# Altium PCB NEW_PCB_2020-12-06_19-04-42.pcbdoc
Units mm, origin at the board's own origin, x right, y up, seen from the top; angles counter-clockwise.
Board outline 47.45 x 32.73 mm, 2 copper layers (Top Layer, Bottom Layer); 1 components, 0 nets, 42 pads, 0 vias.
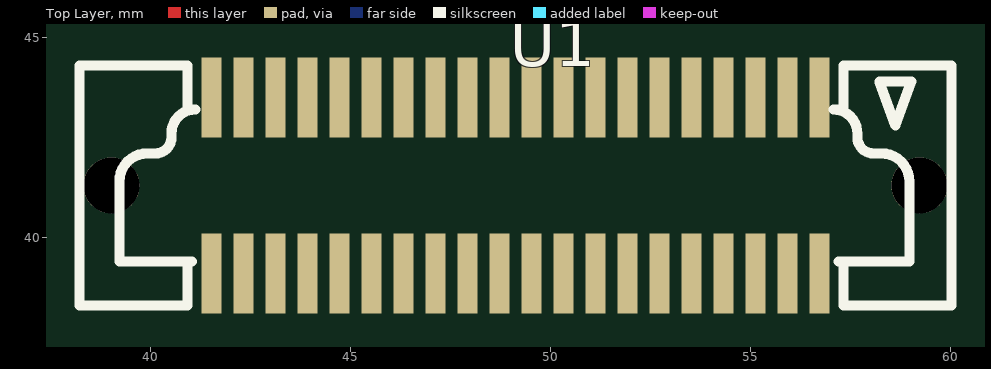
[diagram p0: Top Layer view]
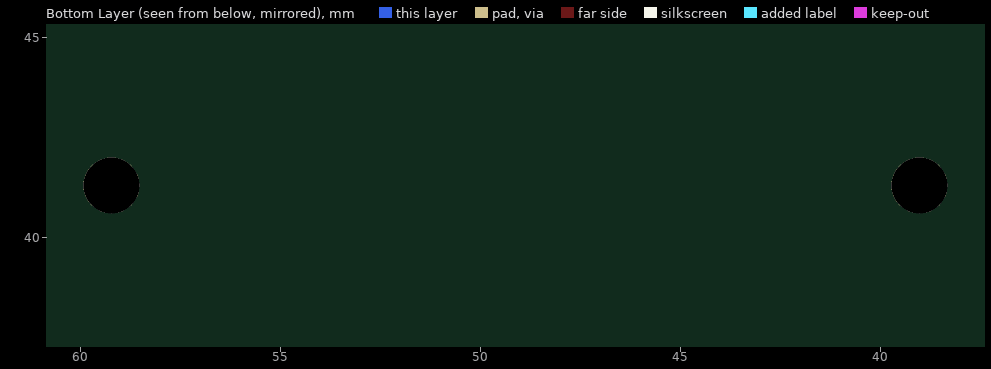
[diagram p1: Bottom Layer view, seen from below]

## Layer stack, top to bottom
Top Layer: signal copper (thickness not stored)
Dielectric: dielectric 0.32, FR-4, Dk 4.8
Bottom Layer: signal copper (thickness not stored)

## Board outline
72.854,25.4 25.4,25.4 25.4,58.128 72.854,58.128

## Components (designator, comment, footprint, x,y, rotation, side; value= is the part's Value field where it differs from the comment)
U1 "CONN-SMD_61082-041400LF" CONN-SMD_61082-041400LF 49.127,41.3 r0 top

## Footprints (in the part's own frame and the unit in brackets; to place one, negate y for a bottom-side part, rotate by r counter-clockwise, add the part's x,y. Pads: shape width x height; smd on the part's side, far side on the other; paste and mask are expansions set on the pad)
CONN-SMD_61082-041400LF [mm]
  rect 0.5x2 smd: 1(7.6,2.2) 2(7.6,-2.2) 3(6.8,2.2) 4(6.8,-2.2) 5(6,2.2) 6(6,-2.2) 7(5.2,2.2) 8(5.2,-2.2) 9(4.4,2.2) 10(4.4,-2.2) 11(3.6,2.2) 12(3.6,-2.2) 13(2.8,2.2) 14(2.8,-2.2) 15(2,2.2) 16(2,-2.2) 17(1.2,2.2) 18(1.2,-2.2) 19(0.4,2.2) 20(0.4,-2.2) 21(-0.4,2.2) 22(-0.4,-2.2) 23(-1.2,2.2) 24(-1.2,-2.2) 25(-2,2.2) 26(-2,-2.2) 27(-2.8,2.2) 28(-2.8,-2.2) 29(-3.6,2.2) 30(-3.6,-2.2) 31(-4.4,2.2) 32(-4.4,-2.2) 33(-5.2,2.2) 34(-5.2,-2.2) 35(-6,2.2) 36(-6,-2.2) 37(-6.8,2.2) 38(-6.8,-2.2) 39(-7.6,2.2) 40(-7.6,-2.2)
  round 1.4 hole 1.4 unplated: ""(-10.1,0) ""(10.1,0)
  silkscreen extent -10.9,-3 10.9,3

## Nets (pads, with @x,y where several pads share a name; then routed paths per layer and width w, separated by ;. In a path a pad name is that pad's centre, name@x,y a point inside that pad or via, vN(x,y) a via of type N, cw(c..) or ccw(c..) an arc to the next point about the centre after c; other vN are vias at no path point)
pads on no net: U1. U1.1 U1.2 U1.3 U1.4 U1.5 U1.6 U1.7 U1.8 U1.9 U1.10 U1.11 U1.12 U1.13 U1.14 U1.15 U1.16 U1.17 U1.18 U1.19 U1.20 U1.21 U1.22 U1.23 U1.24 U1.25 U1.26 U1.27 U1.28 U1.29 U1.30 U1.31 U1.32 U1.33 U1.34 U1.35 U1.36 U1.37 U1.38 U1.39 U1.40

## Silkscreen, mask and mechanical layers (free items; w line width, h text height)
Document:
  lines w0.003: 49.102,41.738 49.152,41.789